# Altium PCB controller.PcbDoc
Units mm, origin at the board's own origin, x right, y up, seen from the top; angles counter-clockwise.
Board outline 50 x 30 mm, 2 copper layers (Top Layer, Bottom Layer), stack 1.57 mm thick; 21 components, 18 nets, 114 pads, 25 vias.
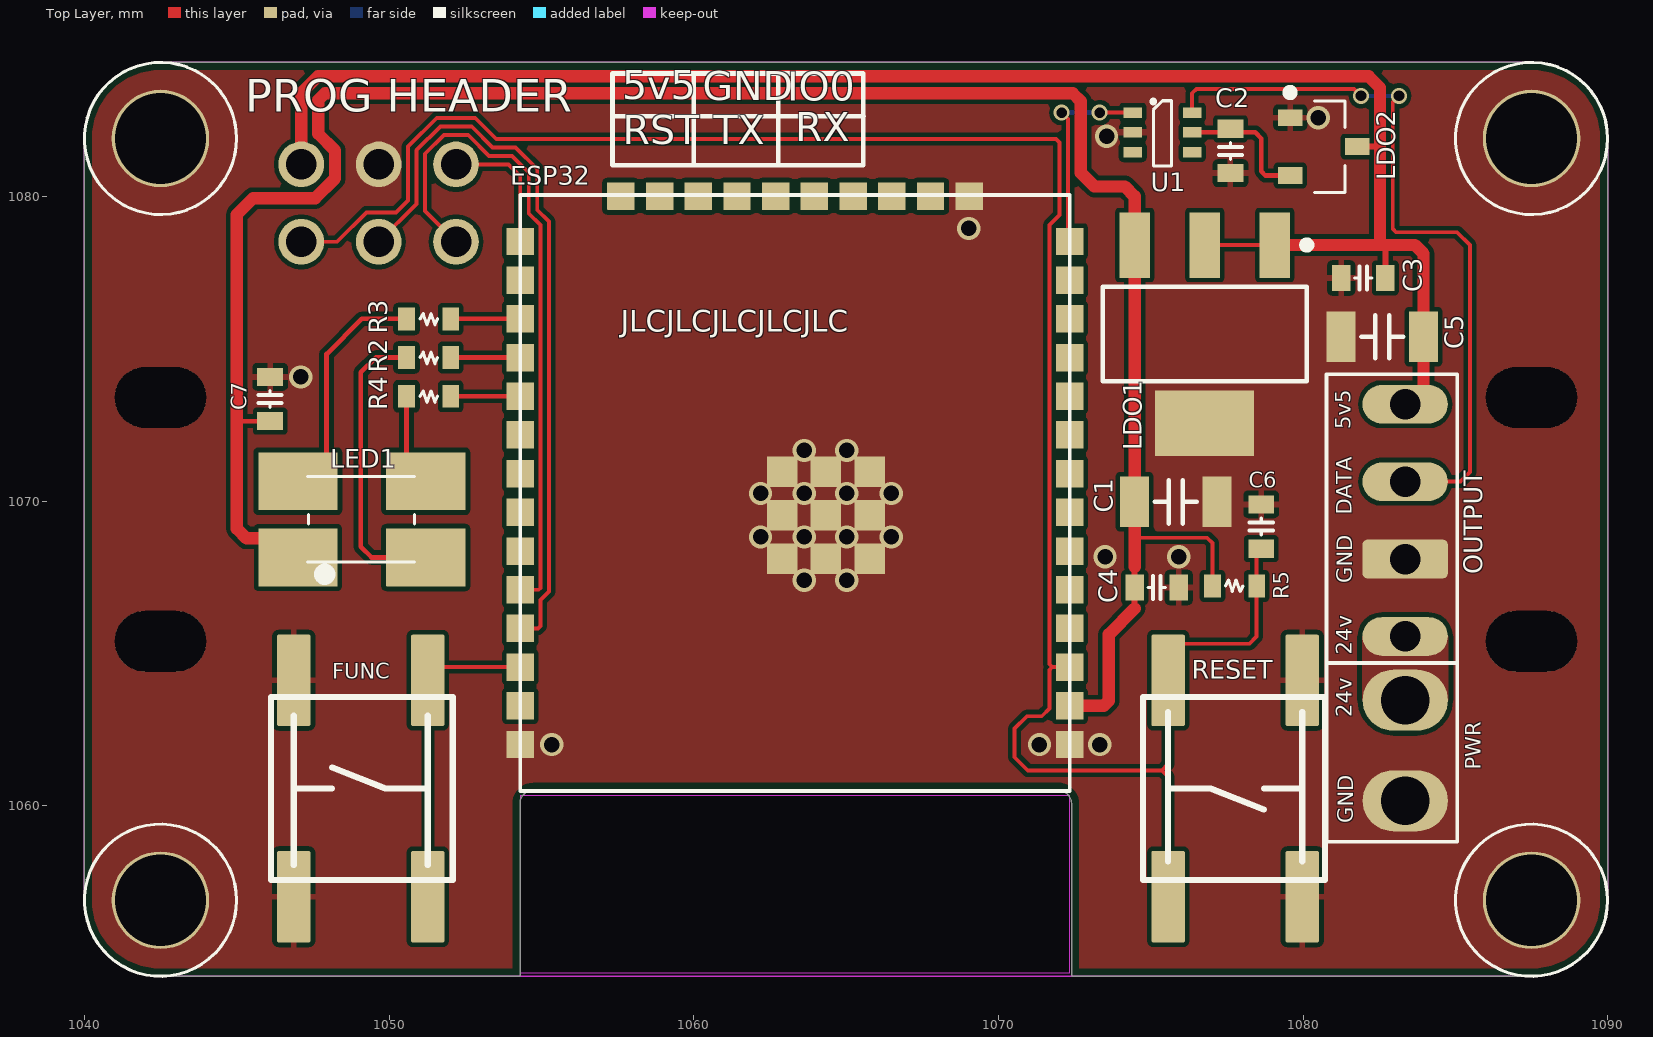
[diagram p0: Top Layer view]
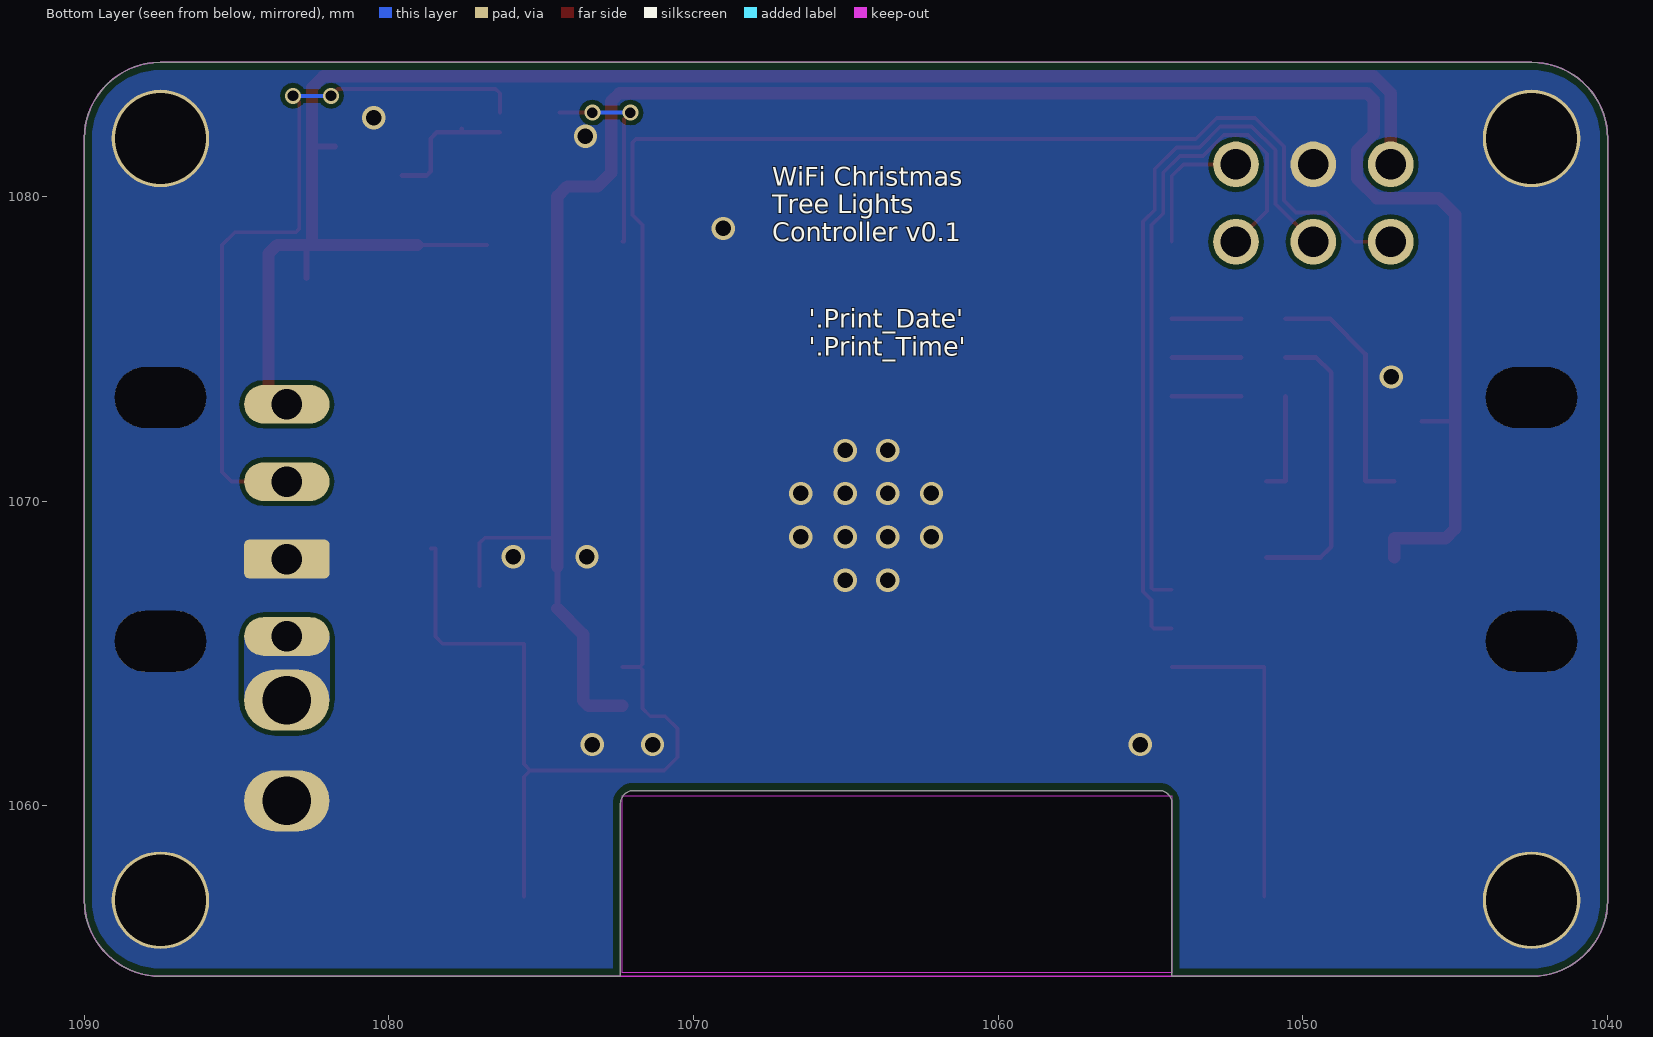
[diagram p1: Bottom Layer view, seen from below]
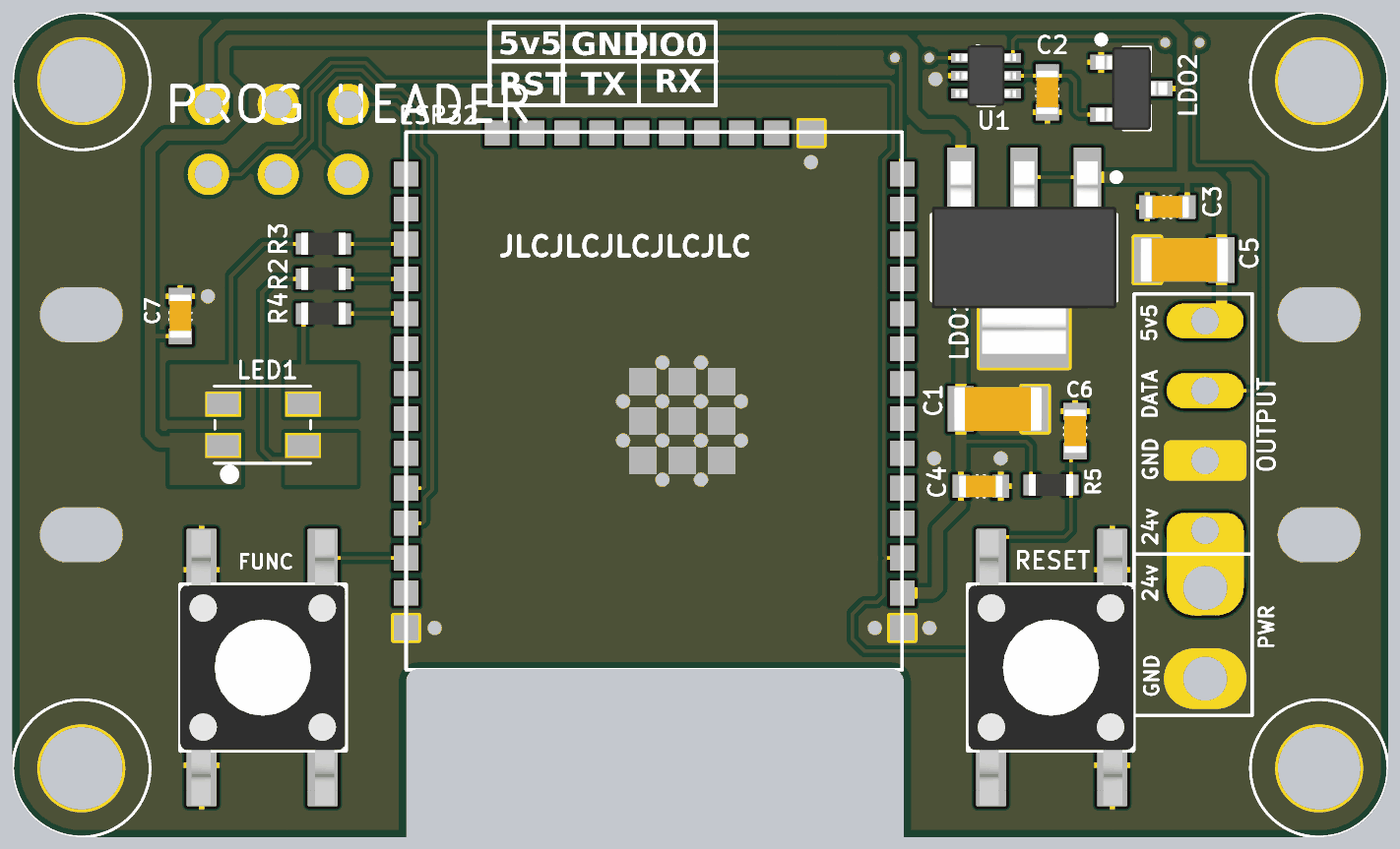
[diagram p2: 3D render of the assembled board from above, using the file's embedded part models]

## Layer stack, top to bottom
Top Solder: solder mask 0.0102, Solder Resist, Dk 3.5
Top Layer: signal copper 0.035
Dielectric 1: core 1.5, FR-4, Dk 4.2
Bottom Layer: signal copper 0.035
Bottom Solder: solder mask 0.0102, Solder Resist, Dk 3.5

## Board outline
1042.5,1054.4 cw(c1042.5,1056.9) 1040,1056.9 1040,1081.9 cw(c1042.5,1081.9) 1042.5,1084.4 1087.497,1084.4 cw(c1087.497,1081.9) 1089.997,1081.9 1089.997,1056.9 cw(c1087.497,1056.9) 1087.497,1054.4 1072.4,1054.4 1072.4,1060.076 ccw(c1071.976,1060.076) 1071.976,1060.5 1054.724,1060.5 ccw(c1054.724,1060.076) 1054.3,1060.076 1054.3,1054.4

## Design rules (kind name [scope] priority, off if disabled: settings)
AssemblyTestPointUsage [All] p1: valid=2
BoardOutlineClearance [(NOT OnLayer('Top Overlay')) AND (NOT OnLayer('Bottom Overlay'))] p1: gap=0.254
Clearance [All] p1: gap=0.152
FabricationTestPointUsage [All] p1: valid=2 allowmultiple=FALSE
HoleSize BIG_HOLES [InPadClass('BIGUNS') OR (PadViaLibraryTemplate='strain_pad')] p1: absolutevalues=TRUE maxlimit=3.2 minlimit=0.025 maxpercent=80.000 minpercent=20.000
HoleSize [All] p2: absolutevalues=TRUE maxlimit=2.54 minlimit=0.025 maxpercent=80.000 minpercent=20.000
MinimumAnnularRing [All] p1: minimumring=0.076
MinimumSolderMaskSliver [All] p1: minsoldermaskwidth=0.097
PolygonConnect [InComponent('PWR') Or InNet('VCC') Or InComponent('PROG HEADER')] p1: connectstyle=Direct reliefconductorwidth=0.254 reliefentries=4 polygonreliefangle="90 Angle" airgapwidth=0.152
PolygonConnect PolygonConnect_STITCH [(PadViaLibraryTemplate = 'stitch2') OR (PadViaLibraryTemplate = 'strain_pad')] p2: connectstyle=Direct reliefconductorwidth=0.254 reliefentries=4 polygonreliefangle="90 Angle" airgapwidth=0.254
PolygonConnect PolygonConnect_MNT [InPadClass('MOUNT') OR InPadClass('GND_PADS') OR InPadClass('BIGUNS')] p3: connectstyle=Direct reliefconductorwidth=0.254 reliefentries=4 polygonreliefangle="90 Angle" airgapwidth=0.254
PolygonConnect PolygonConnect_1 [All] p4: connectstyle=Relief reliefconductorwidth=0.203 reliefentries=4 polygonreliefangle="90 Angle" airgapwidth=0.152
RoutingVias [All] p1: holewidth=0.61 width=0.635 viastyle="Through Hole" minholewidth=0.3 minwidth=0.5 maxholewidth=2.032 maxwidth=2.54 useviatemplates=TRUE viatemplateguid#1={97D54D7D-CFD5-4323-A00E-3590C4FD2072} viatemplateguid#2={B1C9C26E-3DB8-434C-AA22-8843F2ABF3DA} viatemplatename#1=littlun viatemplatename#2=stitch2
SMDNeckDown [All] p1: percent=50.000
SilkToSilkClearance [All] p1: silktosilkclearance=0
SilkToSolderMaskClearance [All] p1: minsilkscreentomaskgap=0 clearancetoexposedcopper=TRUE
SolderMaskExpansion [All] p1: expansion=0.102
Width [All] p1: maxlimit=1.524 minlimit=0.127 preferedwidth=0.127
24 further rules are at their usual default settings.

## Classes and differential pairs
pad class BIGUNS: C5-1 OUTPUT-1 OUTPUT-2
pad class GND_PADS: C1-1 C1-2 C5-1 ESP32-0 ESP32-1 ESP32-15 ESP32-38 HDR-2 LDO1-2 LDO1-4
pad class MOUNT: C5-1 Free-MNT_BL Free-MNT_BR Free-MNT_TL Free-MNT_TR

## Components (designator, comment, footprint, x,y, rotation, side; value= is the part's Value field where it differs from the comment)
C1 "Cap" CAPC_1206_3216X16L 1075.822,1069.975 r180 top
C2 "Cap" CAPC_0603_1608X08L 1077.615,1081.491 r90 top
C3 "Cap" CAPC_0603_1608X08L 1081.977,1077.322 r0 top
C4 "Cap" CAPC_0603_1608X08L 1075.197,1067.16 r180 top
C5 "Cap" CAPC_1206_3216X16L 1082.602,1075.393 r0 top
C6 "Cap" CAPC_0603_1608X08L 1078.627,1069.165 r270 top
C7 "Cap" CAPC_0603_1608X08L 1046.1,1073.35 r270 top
ESP32 "ESP32S_Module" ESP32S 1072.341,1080.044 r180 top
FUNC "4-1437565-1" FSM-SWITCH 1049.604,1059.931 r180 top
LDO1 "LDO" SOT230P700X180-4N 1076.772,1075.479 r270 top
LDO2 "LDO_5V" SOT23 1080.675,1081.634 r0 top
LED1 "RGB_LED" PLCC-4 1049.109,1069.4 r90 top
OUTPUT "CON2" CONNECTOR 1083.353,1069.367 r90 top
"PROG HEADER" "CON6" CON2X3 1052.2,1081.05 r180 top
PWR "PWR_CON2" PWR_CON2 1083.353,1063.465 r0 top
R2 "1K" RESC_0603_1608X08L 1051.3,1074.71 r0 top
R3 "1K" RESC_0603_1608X08L 1051.3,1075.98 r0 top
R4 "1K" RESC_0603_1608X08L 1051.3,1073.44 r0 top
R5 "Res2" RESC_0603_1608X08L 1077.752,1067.21 r180 top
RESET "4-1437565-1" FSM-SWITCH 1077.241,1061.201 r0 top
U1 "Schmidt Inverter" SOT65P210X110-6L 1075.386,1082.1 r0 top

## Footprints (in the part's own frame and the unit in brackets; to place one, negate y for a bottom-side part, rotate by r counter-clockwise, add the part's x,y. Pads: shape width x height; smd on the part's side, far side on the other; paste and mask are expansions set on the pad)
CAPC_0603_1608X08L [mm] "Chip Capacitor 0603"
  rrect1% 0.6x0.85 smd: 1(-0.725,0) 2(0.725,0)
  silkscreen extent -0.28,-0.38 0.28,0.38, body extent -0.8,-0.4 0.8,0.4, height 0.8
CAPC_1206_3216X16L [mm] "Chip Capacitor 1206"
  rrect1% 0.95x1.65 smd: 1(-1.35,0) 2(1.35,0)
  silkscreen extent -0.69,-0.71 0.69,0.71, body extent -1.6,-0.8 1.6,0.8, height 1.6
CON2X3 [mm] "2x3 2.54mm"
  round 1.5 hole 1 paste+0 mask+0: 1(0,0) 2(2.54,0) 3(5.08,0) 4(5.08,2.54) 5(2.54,2.54) 6(0,2.54)
CONNECTOR [mm]
  rrect100% 1.27x2.8 hole 1 paste+0: 1(-3.81,0) 3(1.27,0) 4(3.81,0)
  rrect25% 1.27x2.8 hole 1 paste+0: 2(-1.27,0)
ESP32S [mm] "ESP32S-Module"
  rrect1% 1x1 smd paste+0 mask+0: 0(6.567,9.077) 0(6.567,10.51) 0(6.567,11.943) 0(8,9.077) 0(8,10.51) 0(8,11.943) 0(9.433,9.077) 0(9.433,10.51) 0(9.433,11.943)
  rrect1% 0.9x0.9 smd: 1(0,18.034) 2(0,16.764) 3(0,15.494) 4(0,14.224) 5(0,12.954) 6(0,11.684) 7(0,10.414) 8(0,9.144) 9(0,7.874) 10(0,6.604) 11(0,5.334) 12(0,4.064) 13(0,2.794) 14(0,1.524) 15(3.3,0.034) 16(4.57,0.034) 17(5.84,0.034) 18(7.11,0.034) 19(8.38,0.034) 20(9.65,0.034) 21(10.92,0.034) 22(12.19,0.034) 23(13.46,0.034) 24(14.73,0.034) 25(18.034,1.524) 26(18.034,2.794) 27(18.034,4.064) 28(18.034,5.334) 29(18.034,6.604) 30(18.034,7.874) 31(18.034,9.144) 32(18.034,10.414) 33(18.034,11.684) 34(18.034,12.954) 35(18.034,14.224) 36(18.034,15.494) 37(18.034,16.764) 38(18.034,18.034)
  Keep-Out Layer region: 0,19.71 18.034,19.71 18.034,25.527 0,25.527
  silkscreen extent 0,0 18.03,19.56, body extent 0,0 18.03,25.53, height 2
FSM-SWITCH [mm]
  rrect10% 1.1x3 smd: 1(-1.669,-4.185) 2(2.731,-4.185) 3(-1.669,2.915) 4(2.731,2.915)
  silkscreen extent -2.49,-3.63 3.48,2.36, body extent -2.49,-5.63 3.51,4.37, height 5.07
PLCC-4 [mm] "LED"
  rrect1% 1.9x2.6 smd paste-10 mask-10: 1(-1.25,-2.1) 2(-1.25,2.1) 3(1.25,2.1) 4(1.25,-2.1)
  silkscreen extent -1.9,-1.73 1.4,1.78, body extent -1.4,-1.72 1.4,1.78, height 1.9
PWR_CON2 [mm]
  oval 2.8x2 hole 1.6: 1(0,0) 2(0,-3.302)
RESC_0603_1608X08L [mm] "Chip Resistor, 2-Leads, Body 1.60x0.80mm, IPC High Density"
  rrect1% 0.55x0.75 smd: 1(-0.725,0) 2(0.725,0)
  silkscreen extent -0.28,-0.2 0.3,0.18, body extent -0.8,-0.4 0.8,0.4, height 0.8
SOT23 [mm] "SOT23, 3-Leads, Body 2.90x2.45mm, Pitch 0.95mm, IPC High Density"
  rrect1% 0.8x0.55 smd: 1(-1.1,0.95) 2(-1.1,-0.95) 3(1.1,0)
  silkscreen extent -1.22,-1.5 0.7,1.9, body extent -1.3,-1.5 1.3,1.5, height 1.1
SOT65P210X110-6L [mm] "SOT23, 6-Leads, Body 2.00x2.10mm, Pitch 0.65mm, IPC High Density"
  rrect1% 0.6x0.35 smd: 1(-0.975,0.65) 2(-0.975,0) 3(-0.975,-0.65) 4(0.975,-0.65) 5(0.975,0) 6(0.975,0.65)
  silkscreen extent -0.3,-1.1 0.3,1.04, body extent -1.1,-1.1 1.1,1.1, height 1.1
SOT230P700X180-4N [mm] "SOT223, 4-Leads, Body 6.50x7.00mm (avg), Pitch 2.30mm, IPC Medium Density"
  rrect1% 2.15x1 smd: 1(-2.925,2.3) 2(-2.925,0) 3(-2.925,-2.3)
  rrect1% 2.15x3.25 smd: 4(2.925,0)
  silkscreen extent -3.05,-3.35 1.55,3.48, body extent -3.5,-3.35 3.5,3.35, height 1.8

## Part data
C1 C2 C3 C4 C5 C6 C7: "Capacitor"
ESP32: "Esp-32S"
FUNC RESET: "6x6mm SMD tactile switch,5mm H 1.6N Black Button Tactile Switch, SPST-NO 0.05 A@ 12 V dc 1.4mm"
LDO1: "LDO Voltage Regulator"
LDO2: "Microchip MCP1700T-5002E/TT, LDO Regulator, 250mA, 5 V"
LED1: "dot marks common anode"
R2 R3 R4: library part Res2, "Resistor"
R5: "Resistor"
U1: "ON Semiconductor NLV27WZ14DFT2G"

## Free pads (board coordinates)
  round 3.2 hole 3 mask+0: MNT_BL(1042.5,1056.9) MNT_BR(1087.497,1056.9) MNT_TL(1042.5,1081.9) MNT_TR(1087.497,1081.9)
  oval 3x2 hole 3 slot 2 at 90 deg mask+0: SR1(1087.497,1073.4) SR2(1087.497,1065.4) SR3(1042.5,1073.4) SR4(1042.5,1065.4)

## Via types
v1: diameter 0.762, hole 0.508, Top Layer to Bottom Layer, tented both sides, 21 vias
v2: diameter 0.525, hole 0.35, Top Layer to Bottom Layer, tented both sides, 4 vias

## Nets (pads, with @x,y where several pads share a name; then routed paths per layer and width w, separated by ;. In a path a pad name is that pad's centre, name@x,y a point inside that pad or via, vN(x,y) a via of type N, cw(c..) or ccw(c..) an arc to the next point about the centre after c; other vN are vias at no path point)
DATA_H: OUTPUT.3 U1.6 | length 24.5
  Top Layer w0.127: U1.6 1076.361,1083.386 1076.499,1083.524 1081.676,1083.524 v2(1081.9,1083.3) ; v2(1083.15,1083.3) 1082.946,1083.096 1082.946,1078.929 1083.052,1078.823 1085.052,1078.823 1085.475,1078.4 1085.475,1070.95 1085.162,1070.637 OUTPUT.3
  Bottom Layer w0.127: v2(1081.9,1083.3) v2(1083.15,1083.3)
DATA_L: ESP32.14 U1.1 | length 6.7
  Top Layer w0.127: v2(1072.075,1082.75) 1072.288,1082.537 1072.288,1078.52 ESP32.14 ; v2(1073.325,1082.75) U1.1
  Bottom Layer w0.127: v2(1072.075,1082.75) v2(1073.325,1082.75)
FUNC: ESP32.36 FUNC.1 FUNC.3 | length 10.6
  Top Layer w0.127: FUNC.3 FUNC.1 1051.273,1064.55 ESP32.36
GND: "PROG HEADER.2" C1.1 C2.1 C3.1 C4.1 C5.1 C6.1 C7.1 ESP32.0 ESP32.1 ESP32.15 ESP32.38 FUNC.2 FUNC.4 LDO1.4 LDO2.1 OUTPUT.2 pad.MNT_BL pad.MNT_BR pad.MNT_TL pad.MNT_TR pad.SR1 pad.SR2 pad.SR3 pad.SR4 PWR.2 RESET.2 RESET.4 U1.2
  other v1: 1055.345,1062.01 1071.347,1062.01 1073.328,1062.01 1063.625,1067.402 1065.025,1067.402 1073.5,1068.175 1075.922,1068.175 1062.195,1068.825 1063.625,1068.825 1065.025,1068.825 1066.481,1068.825 1062.195,1070.25 1063.625,1070.25 1065.025,1070.25 1066.481,1070.25 1063.625,1071.663 1065.025,1071.663 1047.1,1074.075 1069.025,1078.95 1073.55,1081.975 1080.5,1082.584
GPIO0: "PROG HEADER.1" ESP32.25 | length 4.4
  Top Layer w0.127: 1052.2,1081.05 1053.925,1081.05 1054.307,1080.668 ESP32.25
IO_B: ESP32.27 R3.2 | length 2.3
  Top Layer w0.152: R3.2 ESP32.27
IO_G: ESP32.29 R4.2 | length 2.3
  Top Layer w0.152: R4.2 ESP32.29
IO_R: ESP32.28 R2.2 | length 2.3
  Top Layer w0.152: R2.2 ESP32.28
NetLED1_1: LED1.1 R2.1 | length 9.7
  Top Layer w0.152: R2.1 1049.56,1074.71 1049.075,1074.225 1049.075,1068.5 1049.425,1068.15 LED1.1
NetLED1_3: LED1.3 R3.1 | length 8.2
  Top Layer w0.152: LED1.3 1047.95,1070.65 1047.95,1074.825 1049.105,1075.98 R3.1
NetLED1_4: LED1.4 R4.1 | length 3.4
  Top Layer w0.152: R4.1 1050.575,1070.65 LED1.4
RESET: "PROG HEADER.4" C6.2 ESP32.3 R5.1 RESET.1 RESET.3 | length 69.2
  Top Layer w0.127: 1047.12,1078.51 1048.294,1078.51 1049.26,1079.476 1050.231,1079.476 1050.626,1079.871 1050.626,1081.632 1051.568,1082.575 1052.832,1082.575 1053.518,1081.888 1071.887,1081.888 1072.008,1081.767 1072.008,1079.39 1071.675,1079.056 1071.675,1064.643 1071.768,1064.55 ; ESP32.3 1071.768,1064.55 ; RESET.1 1075.572,1060.953 1075.364,1061.161 ; C6.2 1078.477,1068.44 R5.1 1078.477,1065.552 1078.241,1065.316 1075.572,1065.316 RESET.3 1075.572,1061.369 1075.364,1061.161 ; 1071.768,1064.55 1071.676,1064.458 1071.676,1063.192 1071.423,1062.939 1070.94,1062.939 1070.534,1062.533 1070.534,1061.593 1070.966,1061.161 1075.364,1061.161
RX: "PROG HEADER.6" ESP32.34 | length 22
  Top Layer w0.127: 1052.2,1078.51 1051.185,1079.525 1051.185,1081.401 1051.8,1082.016 1052.6,1082.016 1053.287,1081.329 1054.041,1081.329 1054.587,1080.783 1054.587,1079.443 1054.975,1079.055 1054.975,1067.15 1054.915,1067.09 ESP32.34
TX: "PROG HEADER.5" ESP32.35 | length 24.4
  Top Layer w0.127: 1049.66,1078.51 1050.905,1079.755 1050.905,1081.516 1051.684,1082.295 1052.716,1082.295 1053.402,1081.609 1054.156,1081.609 1054.866,1080.899 1054.866,1079.559 1055.254,1079.171 1055.254,1067.034 1054.973,1066.753 1054.973,1065.898 1054.895,1065.82 ESP32.35
V5: C2.2 LDO2.2 U1.5 | length 4.5
  Top Layer w0.152: U1.5 C2.2@1077.615,1082.1 ; C2.2 C2.2@1077.615,1082.1 ; LDO2.2 1078.766,1080.684 1078.625,1080.825 1078.625,1081.9 1078.425,1082.1 C2.2@1077.615,1082.1
VCC: OUTPUT.1 PWR.1
VCC3_3: C1.2 C4.2 C7.2 ESP32.2 LDO1.3 LED1.2 R5.2 | length 72.6
  Top Layer w0.127: 1074.472,1068.797 1076.853,1068.797 1077.027,1068.623 R5.2
  Top Layer w0.152: 1045.003,1072.625 C7.2
  Top Layer w0.203: 1074.472,1066.472 C4.2 1074.472,1067.85
  Top Layer w0.406: LED1.2 1047.009,1068.775 1045.325,1068.775 1045.003,1069.097 1045.003,1072.625 1045.003,1079.403 1045.544,1079.944 1047.578,1079.944 1048.226,1080.592 1048.226,1081.508 1047.679,1082.055 1047.679,1083.164 1047.899,1083.384 1072.441,1083.384 1072.707,1083.118 1072.707,1080.768 1073.15,1080.325 1074.15,1080.325 1074.472,1080.003 LDO1.3 C1.2 1074.472,1068.797 1074.472,1067.85 ; ESP32.2 1073.455,1063.28 1073.625,1063.45 1073.625,1065.625 1074.472,1066.472
VOUT: "PROG HEADER.3" C3.2 C5.2 LDO1.1 LDO1.2 LDO2.3 OUTPUT.4 | length 58.1
  Top Layer w0.127: LDO1.2 LDO1.1
  Top Layer w0.203: LDO2.3 1082.527,1081.634 1082.612,1081.634 1082.628,1081.65 ; C3.2 1082.702,1078.404
  Top Layer w0.406: 1047.12,1081.05 1047.12,1083.395 1047.668,1083.943 1082.15,1083.943 1082.527,1083.566 1082.527,1081.634 1082.527,1078.404 ; LDO1.1 LDO1.1 1082.702,1078.406 ; 1082.702,1078.404 1083.671,1078.404 1083.952,1078.123 C5.2 1083.952,1073.177 OUTPUT.4
pads on no net: ESP32.4 ESP32.5 ESP32.6 ESP32.7 ESP32.8 ESP32.9 ESP32.10 ESP32.11 ESP32.12 ESP32.13 ESP32.16 ESP32.17 ESP32.18 ESP32.19 ESP32.20 ESP32.21 ESP32.22 ESP32.23 ESP32.24 ESP32.26 ESP32.30 ESP32.31 ESP32.32 ESP32.33 ESP32.37 U1.3 U1.4

## Polygon pours and split planes (outlines as drawn)
VCC on Bottom Layer "VCC_FILL" (solid, pour order 4): 1081.95,1065.557 1084.757,1065.557 1084.757,1063.465 1081.95,1063.465
GND on Bottom Layer "GNDTOP" (solid, remove dead copper, pour order 12): 1040,1084.4 1089.998,1084.4 1089.986,1054.4 1040,1054.4
VCC on Top Layer "VCC_FILL" (solid, pour order 2): 1081.95,1065.557 1084.758,1065.557 1084.758,1063.465 1081.95,1063.465
GND on Top Layer "GNDTOP" (solid, remove dead copper, pour order 10): 1040,1084.39 1089.997,1084.429 1089.997,1054.4 1040,1054.4
VCC on Top Solder "VCC_FILL" (solid): 1081.95,1065.557 1084.757,1065.557 1084.757,1063.465 1081.95,1063.465
VCC on Bottom Solder "VCC_FILL" (solid): 1081.95,1065.557 1084.757,1065.557 1084.757,1063.465 1081.95,1063.465

## Keep-outs
Keep-Out Layer:
  lines w0.051: 1040,1056.9 ccw(c1042.5,1056.9) 1042.5,1054.4 1087.497,1054.4 ccw(c1087.497,1056.9) 1089.997,1056.9 1089.997,1081.9 ccw(c1087.497,1081.9) 1087.497,1084.4 1042.5,1084.4 ccw(c1042.5,1081.9) 1040,1081.9 1040,1056.9

## Silkscreen, mask and mechanical layers (free items; w line width, h text height)
Top Overlay:
  circle w0.102: c1042.5,1081.9 r2.497
  circle w0.102: c1042.5,1056.9 r2.497
  circle w0.102: c1087.497,1056.9 r2.497
  circle w0.102: c1087.497,1081.9 r2.497
  lines w0.127: 1080.77,1064.688 1080.77,1058.82 1085.063,1058.82 1085.063,1064.688 ; 1080.77,1064.688 1085.063,1064.688 ; 1080.77,1064.688 1080.77,1074.162 1085.063,1074.162 1085.063,1064.688
  lines w0.152: 1057.35,1082.625 1065.58,1082.625 ; 1060.004,1081.025 1060.004,1084.035 ; 1062.773,1081.025 1062.773,1084.035 ; 1057.337,1081.025 1065.567,1081.025 1065.567,1084.035 1057.337,1084.035 1057.337,1081.025
  text "5v5" at 1057.65,1082.875 h1.63
  text "GND" at 1060.3,1082.85 h1.63
  text "IO0" at 1063.075,1082.825 h1.63
  text "RX" at 1063.325,1081.5 h1.63
  text "RST" at 1057.675,1081.4 h1.63
  text "TX" at 1060.65,1081.4 h1.63
  text "JLCJLCJLCJLCJLC" at 1057.6,1075.55 h0.71
  text "5v5" at 1081.565,1072.364 h0.51 r90
  text "DATA" at 1081.59,1069.557 h0.51 r90
  text "GND" at 1081.607,1067.306 h0.51 r90
  text "24v" at 1081.6,1064.95 h0.51 r90
  text "24v" at 1081.6,1062.9 h0.51 r90
  text "GND" at 1081.65,1059.425 h0.51 r90
Bottom Overlay:
  text "WiFi Christmas / Tree Lights / Controller v0.1" at 1067.425,1078.525 h0.61
  text "'.Print_Date' / '.Print_Time'" at 1066.225,1074.775 h0.61
Mechanical 1:
  lines w0.1: 1040,1056.9 1040,1081.9 ; 1042.5,1054.4 1054.3,1054.4 1054.3,1060.076 ; 1042.5,1084.4 1087.497,1084.4 ; 1054.724,1060.5 1060.1,1060.5 1066.4,1060.5 1071.976,1060.5 ; 1072.4,1060.076 1072.4,1054.4 1087.497,1054.4 ; 1089.997,1056.9 1089.997,1081.9
  lines w0.102: 1040,1056.9 ccw(c1042.5,1056.9) 1042.5,1054.4 ; 1040,1081.9 cw(c1042.5,1081.9) 1042.5,1084.4 ; 1054.3,1060.076 cw(c1054.724,1060.076) 1054.724,1060.5 ; 1071.976,1060.5 cw(c1071.976,1060.076) 1072.4,1060.076 ; 1087.497,1054.4 ccw(c1087.497,1056.9) 1089.997,1056.9 ; 1087.497,1084.4 cw(c1087.497,1081.9) 1089.997,1081.9

## Dimensions
1040,1081.9 to 1089.997,1081.9 on Mechanical 2
1087.497,1084.4 to 1087.497,1054.4 on Mechanical 2
1042.5,1081.9 to 1040,1081.9 on Mechanical 2
1042.5,1081.9 to 1042.5,1084.4 on Mechanical 2